# Altium PCB UVA2.0 PCB.PcbDoc
Units mil, origin at the board's own origin, x right, y up, seen from the top; angles counter-clockwise.
Board outline 3862.4 x 3862.41 mil, 2 copper layers (Top Layer, Bottom Layer); 74 components, 54 nets, 233 pads, 124 vias.
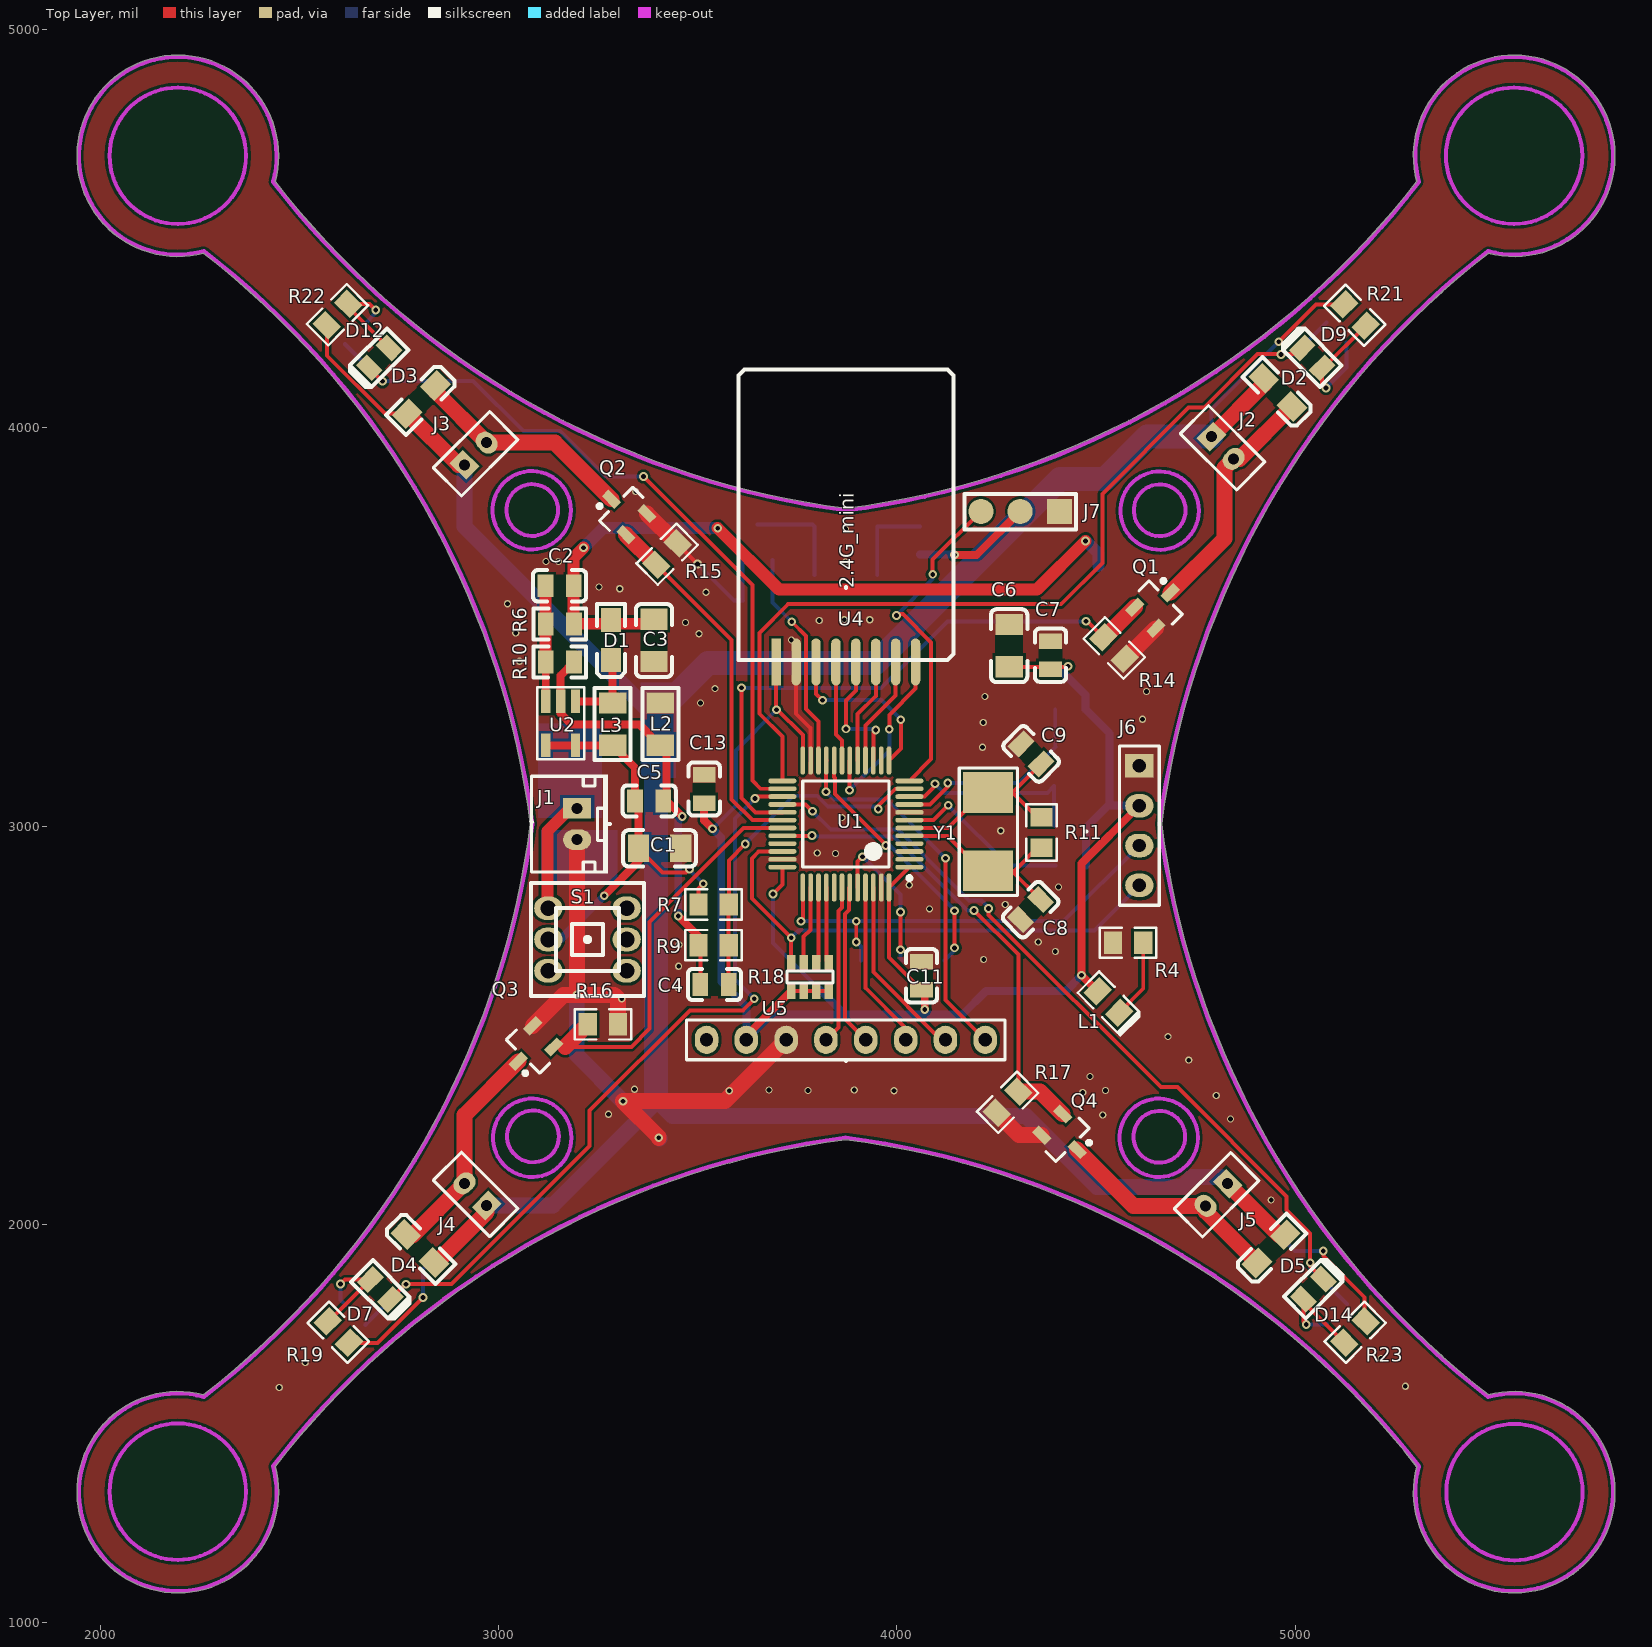
[diagram p0: Top Layer view]
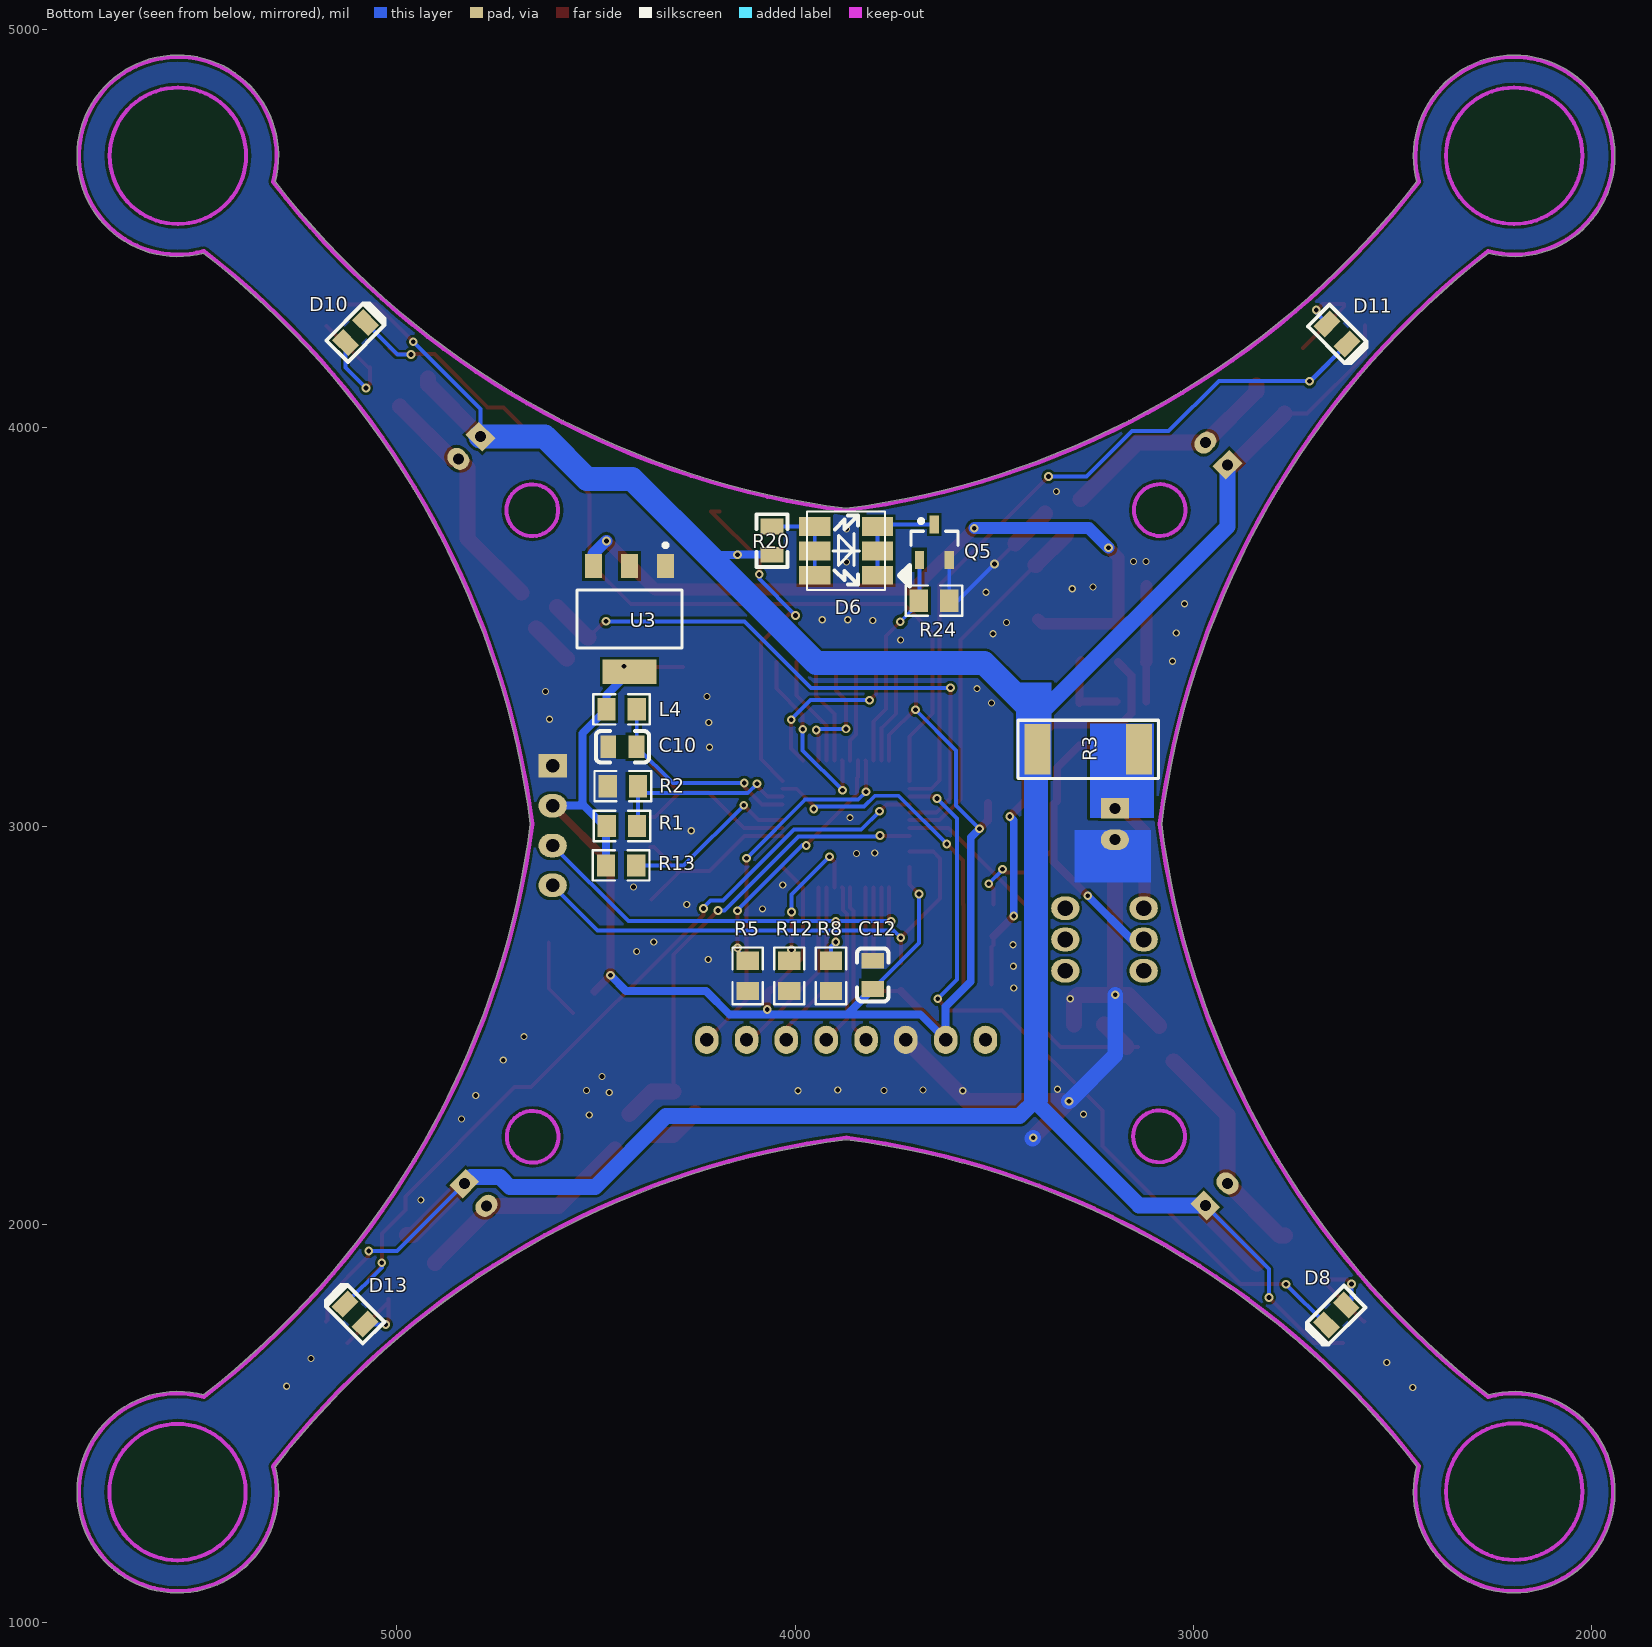
[diagram p1: Bottom Layer view, seen from below]

## Layer stack, top to bottom
Top Solder: solder mask 0.4, Solder Resist, Dk 3.5
Top Layer: signal copper 1.4
Dielectric 1: dielectric 12.6, FR-4, Dk 4.8
Bottom Layer: signal copper 1.4
Bottom Solder: solder mask 0.4, Solder Resist, Dk 3.5

## Board outline
2447.14,1326.91 ccw(c2194.09,1326.91) 2438.72,1391.65 cw(c4151.14,63.5) 3871.59,2212.51 cw(c3592.71,63.41) 5305.61,1390.95 ccw(c5550.41,1326.91) 5803.46,1326.91 ccw(c5550.41,1326.91) 5485.67,1571.53 cw(c6813.82,3283.95) 4664.73,3005.07 cw(c6813.82,2726.18) 5485.67,4438.61 ccw(c5550.41,4683.23) 5803.46,4683.23 ccw(c5550.41,4683.23) 5305.79,4618.48 cw(c3593.37,5946.64) 3872.25,3797.54 cw(c4151.14,5946.64) 2438.72,4618.48 ccw(c2194.09,4683.23) 2447.14,4683.23 ccw(c2194.09,4683.23) 2258.84,4438.61 cw(c930.69,2726.18) 3079.78,3005.07 cw(c930.69,3283.95) 2258.84,1571.53 ccw(c2194.09,1326.91)

## Design rules (kind name [scope] priority, off if disabled: settings)
Clearance [All] p1: gap=7
PlaneConnect [All] p1: planeconnectstyle=Direct reliefexpansion=20 reliefentries=4 reliefconductorwidth=10 reliefairgap=10
PolygonConnect [All] p1: connectstyle=Direct reliefconductorwidth=10 reliefentries=4 polygonreliefangle="90 Angle" airgapwidth=10
RoutingVias [All] p1: holewidth=12 width=22 viastyle="Through Hole" minholewidth=12 minwidth=22 maxholewidth=28 maxwidth=50
SolderMaskExpansion [All] p1: expansion=4
Width [All] p1: maxlimit=60 minlimit=10 preferedwidth=10
28 further rules are at their usual default settings.

## Components (designator, comment, footprint, x,y, rotation, side; value= is the part's Value field where it differs from the comment)
C1 "10UF" 1206C 3404,2944 r180 top
C2 "3.3pF" 0805C 3153,3603.25 r180 top
C3 "4.7UF" 1206C 3390,3466 r270 top
C4 "100NF" 0805C 3542,2602 r180 top
C5 "4.7UF" 0805C 3378,3063 r0 top
C6 "10UF" 1206C 4282,3453 r90 top
C7 "0.1UF" 0805C 4386,3429 r90 top
C8 "20PF" 0805C 4336,2790 r45 top
C9 "20PF" 0805C 4337,3181 r315 top
C10 "100NF" 0805C 4433.64,3199 r0 bottom
C11 "100NF" 0805C 4062,2624 r90 top
C12 "100NF" 0805C 3805,2626 r90 bottom
C13 "100NF" 0805C 3516,3093 r90 top
D1 "DIODE-S" C_SMA_3216 3282,3467 r90 top
D2 "DIODE-S" C_SMA_3216 4957,4089 r135 top
D3 "DIODE-S" C_SMA_3216 2806,4071 r225 top
D4 "DIODE-S" C_SMA_3216 2802,1939 r315 top
D5 "DIODE-S" C_SMA_3216 4940,1938 r45 top
D6 "LED" LED5050_RGB 3872,3691 r180 bottom
D7 "LED" 0805D 2703,1836 r315 top
D8 "LED" 0805D 2641,1772 r315 bottom
D9 "LED" 0805D 5043.19,4176 r135 top
D10 "LED" 0805D 5104,4239 r135 bottom
D11 "LED" 0805D 2639,4236 r225 bottom
D12 "LED" 0805D 2700,4176 r225 top
D13 "LED" 0805D 5105,1774 r45 bottom
D14 "LED" 0805D 5046,1837 r45 top
J1 "Li Battery - 3.7V" P2_2.0-2 3197,3005 r270 top locked
J2 "M1" P2_2.0-1 4818,3950 r135 top
J3 "M1" P2_2.0-1 2942,3935 r225 top
J4 "M1" P2_2.0-1 2942,2074.81 r315 top
J5 "M1" P2_2.0-1 4803,2074 r45 top
J6 "ST_LINK" P4_2.54-1 4609,3001 r270 top
J7 "SIP3" PC_3 4408,3790 r180 top
L1 "白" D0805 4505,2584 r315 top
L2 "10UH" 1206 3406,3256 r270 top
L3 "10UH" 1206 3286,3256 r270 top
L4 "INDUCTOR" R0805 4436,3293 r180 bottom
Q1 "SI2302" SI2302 4655,3555 r45 top
Q2 "SI2302" SI2302 3314,3789 r135 top
Q3 "SI2302" SI2302 3081,2440 r225 top
Q4 "SI2302" SI2302 4422,2219 r315 top
Q5 "SI2302" SI2302 3651,3713 r90 bottom
R1 "RES" R0805 4435,3000 r0 bottom
R2 "RES" R0805 4433,3100 r180 bottom
R3 "0R" "2512R - duplicate" 3264,3193 r0 bottom
R4 "Res1" R0805 4581,2707 r180 top
R5 "RES" R0805 4119.43,2624 r270 bottom
R6 "620K" 0805R 3153.85,3507.2 r0 top
R7 "RES" R0805 3539.64,2803 r0 top
R8 "RES" R0805 3910,2624 r270 bottom
R9 "RES" R0805 3540.06,2700.93 r180 top
R10 "200K" 0805R 3153.85,3412 r180 top
R11 "RES" R0805 4363,2984 r270 top
R12 "RES" R0805 4014.57,2623.58 r90 bottom
R13 "RES" R0805 4437,2901 r180 bottom
R14 "RES" R0805 4546,3447 r135 top
R15 "RES" R0805 3423,3683 r225 top
R16 "RES" R0805 3262,2502 r180 top
R17 "RES" R0805 4278,2306 r45 top
R18 "10k" 8P4R_0603 3781,2621 r90 top
R19 "RES" R0805 2597,1729 r315 top
R20 "100R" 0805R 4058,3717 r90 bottom
R21 "RES" R0805 5150,4283 r315 top
R22 "RES" R0805 2595,4284 r45 top
R23 "RES" R0805 5151,1729 r225 top
R24 "RES" R0805 3651,3566 r0 bottom
S1 "SW-DPDT" KEY_KFT7.0 3223,2715 r180 top locked
U1 "STM32F103C8T6" LQFP48_N 3872,3005 r180 top locked
U2 "TPS6140" SOT-23-5 3193,3313 r270 top
U3 "AMS1117" ZZ311 4416,3520 r0 bottom
U4 "2.4G" 2.4G_mini 3697,3412 r0 top locked
U5 "GY_86" P8_2.54-1 3872,2463 r0 top locked
Y1 "CRYSTAL1" Y2 4229,2986 r270 top

## Footprints (in the part's own frame and the unit in brackets; to place one, negate y for a bottom-side part, rotate by r counter-clockwise, add the part's x,y. Pads: shape width x height; smd on the part's side, far side on the other; paste and mask are expansions set on the pad)
2.4G_mini [mm]
  rect 0.6x3 smd: 1(0,0)
  oval 0.6x3 smd: 2(1.27,0) 3(2.54,0) 4(3.81,0) 5(5.08,0) 6(6.35,0) 7(7.62,0) 8(8.89,0)
  silkscreen extent -2.41,0.13 11.3,18.67
8P4R_0603 [mil]
  rect 40x21.65 smd: 1(-35,46.5) 2(35,46.5) 3(-35,15) 4(35,15) 5(-35,-16.5) 6(35,-16.5) 7(-35,-47.99) 8(35,-47.99)
  silkscreen extent -15,-59 15,56
0805C [mm]
  rect 1x1.45 smd: 1(-0.9,0) 2(0.9,0)
  Top Layer pour cut-out: -0.432,0.749 -0.432,-0.737 0.406,-0.737 0.406,0.749
  silkscreen extent -1.7,-1 1.7,1, body extent -1,-0.61 1,0.64, height 1
0805D [mm]
  rect 1x1.45 smd: 1(-0.9,0) 2(0.9,0)
  Top Layer pour cut-out: -0.432,0.749 -0.432,-0.737 0.406,-0.737 0.406,0.749
  silkscreen extent -1.66,-0.98 1.94,0.98, body extent -1.16,-0.68 1.14,0.67, height 0.76
0805R [mm]
  rect 1x1.45 smd: 1(-0.9,0) 2(0.9,0)
  Top Layer pour cut-out: -0.432,0.749 -0.432,-0.737 0.406,-0.737 0.406,0.749
  silkscreen extent -1.68,-0.98 1.68,0.98, body extent -1,-0.62 1,0.63, height 0.5
1206 [mm]
  rect 1.35x1.75 smd: 1(-1.35,0) 2(1.35,0)
  Top Layer pour cut-out: -0.686,0.864 0.673,0.864 0.673,-0.876 -0.686,-0.876
  silkscreen extent -2.3,-1.14 2.3,1.14, body extent -1.61,-0.81 1.59,0.79, height 1.5
1206C [mm]
  rect 1.35x1.75 smd: 1(-1.35,0) 2(1.35,0)
  Top Layer pour cut-out: -0.686,0.876 0.673,0.876 0.673,-0.864 -0.686,-0.864
  silkscreen extent -2.32,-1.16 2.32,1.16, body extent -1.65,-0.81 1.55,0.79, height 1
"2512R - duplicate" [mm]
  rect 1.65x3.2 smd: 1(-3.24,0) 2(3.24,0)
  silkscreen extent -4.49,-1.84 4.48,1.87, body extent -2.48,-1.26 2.52,1.24, height 0.6
C_SMA_3216 [mil] "英制1206/公制3216"
  rect 60x50 smd: 1(-50,0) 2(50,0)
  Top Layer pour cut-out: -19.68,29.53 19.68,29.53 19.68,-29.53 -19.68,-29.53
  silkscreen extent -93,-35 91,35, body extent -66,-33 68,33, height 67
D0805 [mil]
  rect 46x56 smd: 1(-1,0) 2(75,0)
  silkscreen extent -34,-40 120,40
KEY_KFT7.0 [mm] "7X7mm"
  oval 1.8x1.5 hole 1: 1(-2.5,2) 2(-2.5,0) 3(-2.5,-2) 4(2.5,-2) 5(2.5,0) 6(2.5,2)
  silkscreen extent -3.6,-3.6 3.6,3.6
LED5050_RGB [mm]
  rect 2x1.2 smd paste-0.05 mask+0.05: 1(-2,1.55) 2(-2,0) 3(-2,-1.55) 4(2,-1.55) 5(2,0) 6(2,1.55)
  silkscreen extent -2.51,-2.49 4.06,2.51, body extent -2.68,-2.5 2.62,2.5, height 1.6
LQFP48_N [mm]
  oval 1.8x0.3 smd: 1(-4.05,2.75) 2(-4.05,2.25) 3(-4.05,1.75) 4(-4.05,1.25) 5(-4.05,0.75) 6(-4.05,0.25) 7(-4.05,-0.25) 8(-4.05,-0.75) 9(-4.05,-1.25) 10(-4.05,-1.75) 11(-4.05,-2.25) 12(-4.05,-2.75) 25(4.05,-2.75) 26(4.05,-2.25) 27(4.05,-1.75) 28(4.05,-1.25) 29(4.05,-0.75) 30(4.05,-0.25) 31(4.05,0.25) 32(4.05,0.75) 33(4.05,1.25) 34(4.05,1.75) 35(4.05,2.25) 36(4.05,2.75)
  oval 0.3x1.8 smd: 13(-2.75,-4.05) 14(-2.25,-4.05) 15(-1.75,-4.05) 16(-1.25,-4.05) 17(-0.75,-4.05) 18(-0.25,-4.05) 19(0.25,-4.05) 20(0.75,-4.05) 21(1.25,-4.05) 22(1.75,-4.05) 23(2.25,-4.05) 24(2.75,-4.05) 37(2.75,4.05) 38(2.25,4.05) 39(1.75,4.05) 40(1.25,4.05) 41(0.75,4.05) 42(0.25,4.05) 43(-0.25,4.05) 44(-0.75,4.05) 45(-1.25,4.05) 46(-1.75,4.05) 47(-2.25,4.05) 48(-2.75,4.05)
  silkscreen extent -4.18,-2.75 2.75,3.57
P2_2.0-1 [mm]
  rect 1.2x1.5 hole 0.7: 1(1,0)
  oval 1.2x1.5 hole 0.7: 2(-1,0)
  silkscreen extent -2.54,-1.27 2.54,1.27
P2_2.0-2 [mm]
  rect 1.3x1.8 hole 0.7: 1(-1,0)
  oval 1.3x1.8 hole 0.7: 2(1,0)
  silkscreen extent -3.15,-2.9 3.16,1.97, body extent -2.99,-2.8 3.01,1.7, height 6
P4_2.54-1 [mm]
  rect 1.5x1.8 hole 0.85: 1(-3.81,0)
  oval 1.5x1.8 hole 0.85: 2(-1.27,0) 3(1.27,0) 4(3.81,0)
  silkscreen extent -5.08,-1.27 5.08,1.27, body extent -5.08,-1.47 5.08,1.45, height 8.56
P8_2.54-1 [mm]
  oval 1.5x1.8 hole 0.85: 1(-8.89,0) 2(-6.35,0) 3(-3.81,0) 4(-1.27,0) 5(1.27,0) 6(3.81,0) 7(6.35,0) 8(8.89,0)
  silkscreen extent -10.16,-1.27 10.16,1.27, body extent -10.16,-1.47 10.16,1.45, height 8.56
PC_3 [mm]
  rect 1.6x1.6 smd: 1(0,0)
  round 1.6 smd: 2(2.5,0) 3(5,0)
  silkscreen extent -1.07,-1.12 6.05,1.14
R0805 [mil]
  rect 46x56 smd: 1(-37.79,0.07) 2(38.21,0.07)
  silkscreen extent -71,-38 71,38
SI2302 [mm]
  rect 1.15x0.6 smd: 1(-1.128,0.934) 2(-1.128,-0.966) 3(1.122,-0.016)
  silkscreen extent -0.2,-1.52 1.47,1.48, body extent -0.7,-1.52 0.7,1.48, height 1.1
SOT-23-5 [mm]
  rect 1.5x0.6 smd: 1(0,0) 2(0,-0.95) 3(0,-1.9) 4(2.8,-1.9) 5(2.8,0)
  silkscreen extent -0.9,-2.45 3.7,0.55
Y2 [mm]
  rect 2.6x3.2 smd: 1(-2.5,0) 2(2.5,0)
  silkscreen extent -4.06,-1.83 4.09,1.87
ZZ311 [mm]
  rect 1.1x1.55 smd: 1(-2.3,-3.375) 2(0,-3.375) 3(2.3,-3.375)
  rect 3.45x1.55 smd: 4(0,3.375)
  silkscreen extent -3.35,-4.82 3.35,1.85

## Part data
C1 C2 C3 C4 C5 C6 C7 C8 C9 C10 C11 C12 C13: library part CAP, "Capacitor/小容量电容"
D1 D2 D3 D4 D5: "SCHOTTKEY"
D6: library part LED_5050RGB
J1 J2 J3 J4 J5: library part SIP2
J6: library part SIP4
L1: library part LED
L2 L3: library part L
R1 R2 R5 R7 R8 R9 R11 R12 R13 R14 R15 R16 R17 R19 R21 R22 R23 R24: "Semiconductor Resistor"
R3: library part Res_1
R4: "Resistor"
R6 R10 R20: library part Res
R18: library part 8P4R_0603, "8P4R_0603"
S1: "Double-Pole, Double-Throw Switch"
U1: "STM32 ARM-based 32-bit MCU with 64 Kbytes Flash, 48-pin LQFP, Industrial Temperature"
U3: "Header, 2-Pin"
U4: library part 2.4G_mini

## Via types
v1: diameter 22, hole 12, Top Layer to Bottom Layer, 65 vias
v2: diameter 18, hole 12, Top Layer to Bottom Layer, 59 vias

## Nets (pads, with @x,y where several pads share a name; then routed paths per layer and width w, separated by ;. In a path a pad name is that pad's centre, name@x,y a point inside that pad or via, vN(x,y) a via of type N, cw(c..) or ccw(c..) an arc to the next point about the centre after c; other vN are vias at no path point)
2.4_CE: U1.13 U4.3 | length 434.8
  Top Layer w10: U4.3 3797,3332 v1(3813,3316) ; U1.13 4010,3194.18 v1(4010,3267)
  Bottom Layer w10: v1(3813,3316) 3961,3316 v1(4010,3267)
2.4_CSN: U1.19 U4.4 | length 253.8
  Top Layer w10: U4.4 3847,3230 3862.16,3214.84 U1.19
2.4_IRQ: U1.18 U4.8 | length 465.6
  Top Layer w10: v1(3881,3090) 3881,3163.61 U1.18 ; v1(3981,3243) 3981,3279 4047,3345 U4.8
  Bottom Layer w10: v1(3881,3090) 3981,3190 v1(3981,3243)
2.4_MISO: U1.16 U4.7 | length 278.9
  Top Layer w10: U1.16 3921.21,3252.21 3997,3328 U4.7
2.4_MOSI: U1.17 U4.6 | length 266.4
  Top Layer w10: U1.17 3901.53,3281.53 3947,3327 U4.6
2.4_SCK: U1.15 U4.5 | length 333.7
  Top Layer w10: v1(3872,3244) 3872,3315 3897,3340 U4.5 ; U1.15 3940.9,3234.9 v1(3947,3241)
  Bottom Layer w10: v1(3872,3244) 3944,3244 v1(3947,3241)
505LED: Q5.1 R24.2 U1.22 | length 551.9
  Top Layer w10: v1(3736,3513) 3772,3477 3772,3294 3803.1,3262.9 U1.22
  Bottom Layer w10: Q5.1 3687.77,3561.23 v1(3736,3513)
+3.3V: C6.1 C7.1 C11.1 C12.1 C13.1 J6.2 L1.1 L4.1 R1.2 R13.1 R18.1 R18.3 R18.5 R18.7 U1.1 U1.24 U1.36 U1.48 U3.4 U4.1 U5.2 | length 4687.1
  Top Layer w10: v1(3689,2829) 3712.55,2852.55 U1.36 ; U4.1 3697,3295 v1@3698,3294 ; v1(3698,3292) v1@3698,3294 ; R18.1 R18.3 R18.5 R18.7 ; U1.24 3763.73,3228.27 v1@3698,3294 ; U1.1 U1.48 3980.27,2670.3 C11.1 ; C6.1 4428.72,3399.85 v1(4429.87,3401)
  Top Layer w20: C13.1 3516,3014 v1(3537,2993) ; U5.2 3622,2473.5 R18.1 ; C11.1 4070,2580.57 v1(4070,2539) ; L1.1 v1(4464,2625) 4464,2906 J6.2
  Bottom Layer w10: v1(3537,2993) 3596,3052 3596,3190 v1(3698,3292) ; v1(3689,2829) 3689,2706.57 C12.1 ; U3.4 v1(4429.87,3401)
  Bottom Layer w20: v1(3537,2993) 3559,2971 3559,2609.4 3622,2546.4 U5.2 3686,2527 3868.57,2527 ; C12.1 3868.57,2527 ; 4070,2527 3868.57,2527 ; v1(4070,2539) 4071,2538 4071,2527 4165.28,2527 4224.07,2585.79 4424.79,2585.79 v1(4464,2625) ; U3.4 4473.79,3329.34 L4.1 4534,3232.86 4534,3059 4542,3051 ; R13.1 4474.79,2995.79 4530,3051 J6.2
+5.0V: C2.1 C3.1 D1.2 R6.2 U3.3 | length 1879.5
  Top Layer w30: v1(3213,3699) 3188.43,3674.43 C2.1 3188.43,3508.05 3378.9,3508.05 C3.1 ; v1(3550,3748) 3704,3594 4352,3594 v1(4474,3716)
  Bottom Layer w30: v1(3213,3699) 3262,3748 v1(3550,3748) ; v1(4474,3716) 4506.55,3683.45 U3.3
ADC: C4.1 R7.2 R9.1 U1.11 | length 871.7
  Top Layer w10: C4.1 3577.43,2802.65 R7.2 3577.85,2913.85 v1(3619,2955) ; v1(3953,3043) 3953,3050.3 3996.28,3093.58 U1.11
  Bottom Layer w10: v1(3619,2955) 3740,3076 3799.47,3076 3826.47,3049 3947,3049 v1(3953,3043)
BAT: J1.1 R3.1 S1.4 | length 292.8
  Top Layer w30: S1.4@3124,2793 3123,2794 3123,2988 3179.37,3044.37 J1.1
BAT+: D2.2 D3.2 D4.2 D5.2 J2.1 J3.1 J4.1 J5.1 J7.2 R3.2 R19.2 R20.1 R21.1 R22.1 R23.1 | length 8536.2
  Top Layer w10: R22.1 2568.23,4181.77 2714.36,4035.64 D3.2 ; R19.2 2696.03,1702.03 v1(2810,1816) ; v1(4959,4216) 5052.77,4309.77 R21.1 ; v1(5071,1933) 5071,1920 5174.49,1816.51 5174.49,1758.96 R23.1
  Top Layer w20: v1(4145,3681) 4200.57,3681 J7.2
  Top Layer w40: D3.2 2899.13,3907.16 J3.1 ; D4.2@2840.36,1900.64 2969.84,2030.13 J4.1 ; J2.1 4921.64,4109.32 D2.2 ; J5.1 4959.32,1973.36 D5.2
  Bottom Layer w10: v1(2810,1816) 2810,1887.14 J4.1 ; J2.1 4790.16,4047.16 v1(4959,4216) ; J5.1 4999.68,1933 v1(5071,1933)
  Bottom Layer w20: R20.1 v1@4145,3681.57 ; v1(4145,3681) 4207,3681 4213,3675
  Bottom Layer w40: J3.1 2914.16,3751.84 3391.5,3274.5 ; J4.1 3135.98,2046.98 3395,2306 ; 3395,2313 3436,2272 4324,2272 4502.5,2093.5 4716.5,2093.5 4741,2118 4814.68,2118 J5.1
  Bottom Layer w60: 3391.5,3274.5 3526,3409 3947,3409 4213,3675 4410,3872 4523,3872 4628.84,3977.84 J2.1 ; 3395,2313 3395,3151.56 R3.2@3414,3170.56
GND: C1.1 C3.2 C6.2 C7.2 C8.1 C9.1 C10.2 C11.2 C12.2 C13.2 J1.2 J6.1 J7.1 L2.1 Q1.2 Q2.2 Q3.2 Q4.2 Q5.2 R2.1 R4.2 R5.2 R8.2 R12.1 R14.1 R15.1 R16.1 R17.1 R24.1 U1.8 U1.23 U1.35 U1.47 U3.1 U4.2 U5.3 | length 2567.7
  Top Layer w10: R15.1@3447.11,3709.67 3447.33,3709.67 v1(3499,3658) ; U4.2 3747,3282 3783.42,3245.58 U1.23
  Top Layer w40: Q3.2 3163.22,2576 v1(3196,2576) ; J1.2 3197,2577 v1(3196,2576) ; R16.1 3299.79,2566.21 3290,2576 v1(3196,2576) ; Q2.2 R15.1@3447.11,3709.67 ; v1(3402,2217) 3402,2219 v1(3312,2309) 3568,2309 U5.3 ; R17.1 4307.05,2223.51 Q4.2 ; R14.1 4574.01,3420.23 Q1.2
  Bottom Layer w10: v1(3499,3658) 3591.07,3565.93 R24.1 3612.97,3566.17 Q5.2
  Bottom Layer w40: v1(3196,2576) 3196,2425 v1(3312,2309) ; v1(3402,2217) v1@3404,2215
  other v2: 2449,1590 5277,1593 2514,1653 5216,1663 4940,2061 4838,2264 4517,2274 3276,2276 4802,2323 4467,2331 3579,2335 3993,2335 3777,2336 4524,2336 3679,2337 3893,2337 3341,2339 4485,2371 4733,2412 4681,2471 3309,2566 3451,2593 3452,2648 4218,2665 4398,2685 3453,2702 4355,2709 4082,2792 4272,2803 4406,2847 4031,2852 3846,2931 3800,2932 4261,2988 3862,3021 4215,3198 4217,3260 4617,3268 3507,3309 4221,3325 4627,3338 3543,3345 3052,3414 3735,3467 3503,3483 3043,3485 3469,3511 3805,3516 3868,3518 3932,3518 3022,3558 3521,3587 3304,3596 3252,3600 3871,3663 3119,3664 3150,3664 3871,3746 3344,3840
GY_DRDY: U1.21 U5.8 | length 945.4
  Top Layer w10: v1(3822,3086) 3822,3163.66 U1.21 ; v1(4122,2919) 4122,2563 U5.8
  Bottom Layer w10: v1(3822,3086) 3842,3066 3975,3066 v1(4122,2919)
GY_FSYNC: U1.45 U5.6 | length 424.3
  Top Layer w10: U1.45 3921.21,2593.79 4022,2493 U5.6
GY_INTA: U1.46 U5.7 | length 464
  Top Layer w10: U1.46 3940.9,2633.1 4111,2463 U5.7
GY_SCL: U1.42 U5.4 | length 399.2
  Top Layer w10: U5.4 3853,2494 3853,2786.04 3862.16,2795.2 U1.42
GY_SDA: U1.43 U5.5 | length 409
  Top Layer w10: U1.43 3880.06,2843.77 3880.06,2789.06 3870,2779 3870,2515 U5.5
JTCK: J6.3 R8.1 U1.37 | length 1119.4
  Top Layer w10: v1(3759,2761) 3763.73,2765.73 U1.37 ; v1(3898,2709) v1(3898,2761)
  Bottom Layer w10: v1(3759,2761) v1(3898,2761) 4419,2761 J6.3 ; v1(3898,2709) 3909.93,2697.07 R8.1
JTDI: R18.4 U1.38 | length 196.8
  Top Layer w10: R18.4 3766,2722 3783.42,2739.42 U1.38
JTDO: R18.6 U1.39 | length 191.9
  Top Layer w10: R18.6 3803.1,2661.61 U1.39
JTMS: J6.4 R18.2 U1.34 | length 1316.4
  Top Layer w10: U1.34 3653.1,2936.1 3636,2919 3636,2818 v1(3734.5,2719.5) R18.2
  Bottom Layer w10: v1(3734.5,2719.5) 3753.01,2738 4496,2738 J6.4
JTRST: R18.8 U1.40 | length 192.1
  Top Layer w10: U1.40 3822.79,2662.2 R18.8
LED_1: D9.2 D10.2 U1.25 | length 2303.7
  Top Layer w10: U1.25 3712.55,3224.45 3655,3282 3655,3485 3727,3557 4412,3557 4516,3661 4516,3834 4733,4051 4772,4051 4906,4185 5002.08,4185 D9.2
  Bottom Layer w10: v1(4965,4184) 4998.89,4184 D10.2
LED_2: D11.2 D12.2 U1.26 | length 2030.9
  Top Layer w10: D12.2 2674.95,4149.94 v1(2708,4116.89) ; v1(3364,3878) 3637,3605 3637,3114 3657.42,3093.58 U1.26
  Bottom Layer w10: v1(2708,4116.89) D11.2 2613.95,4209.06 2705,4118 2936,4118 3062,3992 3154,3992 3268,3878 v1(3364,3878)
LED_3: D7.2 D8.2 U1.27 | length 2036
  Top Layer w10: D7.2 v1@2766.55,1849.44 ; v1@2767.11,1850 2881.82,1850 3228,2196.18 3228,2285 3480,2537 3613,2537 v1(3642,2566) ; v1(3644,3069) 3648.9,3073.9 U1.27
  Bottom Layer w10: D8.2 2666.05,1748.06 v1(2767,1849) ; v1(3642,2566) 3594,2614 3594,3019 v1(3644,3069)
LED_4: D13.2 D14.2 U1.28 | length 2072.8
  Top Layer w10: U1.28 3770.79,3054.21 v1(3788,3037) ; v1(4230,2793) 4230,2777 4663,2344 4705,2344 4979,2070 4979,2036 5038,1977 v1(5038,1903) 5038,1895.11 D14.2
  Bottom Layer w10: v1(3788,3037) 3834,2991 4003,2991 4181,2813 4212,2813 4230,2795 v1(4230,2793) ; v1(5038,1903) 5038,1891.11 D13.2
MOS_1: Q1.1 R14.2 U1.29 | length 1498.9
  Top Layer w10: v1(3610,3347) 3610,3070 3645.47,3034.53 U1.29 ; v1(4475,3514) 4478.9,3514 R14.2
  Top Layer w40: R14.2 4521.97,3473.97 Q1.1
  Bottom Layer w10: v1(3610,3347) 3960,3347 4127,3514 v1(4475,3514)
MOS_2: Q2.1 R15.2 U1.30 | length 924.3
  Top Layer w10: R15.2 3585,3466.96 3585,3067 3637.16,3014.84 U1.30
  Top Layer w40: Q2.1 3395.07,3655.93 R15.2
MOS_3: Q3.1 R16.2 U1.31 | length 1038.8
  Top Layer w10: Q3.1 3167.26,2445.4 3333.4,2445.4 3379,2491 3379,2759 3615.16,2995.16 U1.31
  Top Layer w40: 3167.26,2445.4 R16.2
MOS_4: Q4.1 R17.2 U1.32 | length 1195.5
  Top Layer w10: U1.32 3786.47,2975.47 v1(3787,2976) ; v1(4194,2788) 4304.97,2677.03 R17.2
  Top Layer w40: R17.2 4359.93,2333.07 Q4.1
  Bottom Layer w10: v1(3787,2976) 3789,2974 3991,2974 4177,2788 v1(4194,2788)
NetC1_2: C1.2 C5.1 L3.2 R7.1 S1.5 U2.4 U2.5 | length 1059
  Top Layer w10: C1.2 3411.83,2883.02 3470.49,2883.02 v1(3479,2891.53) ; R7.1 3501.85,2842.85 v1(3514,2855)
  Top Layer w20: U2.4 U2.5 3285.91,3202.76 L3.2 3342.57,3146.28 C5.1 3350.85,3054.72 C1.2 3350.85,2910.85 v1(3265,2825)
  Bottom Layer w10: v1(3479,2891.53) 3479,2890 v1(3514,2855)
  Bottom Layer w20: S1.5 3155,2715 v1(3265,2825)
NetC2_2: C2.2 R6.1 R10.2 U2.3 | length 290.7
  Top Layer w20: U2.3 3118.2,3411.78 R10.2
  Top Layer w30: C2.2 3117.57,3412.85 R10.2
NetC8_2: C8.2 R11.2 U1.5 Y1.2 | length 495.1
  Top Layer w10: U1.5 4127.53,2975.47 4215.43,2887.57 Y1.2 4295.57,2887.57 4354.79,2946.79 R11.2@4363.07,2946.79 ; Y1.2@4288.54,2887.57 C8.2
NetC9_2: C9.2 R11.1 U1.6 Y1.1 | length 495.3
  Top Layer w10: U1.6 4128.16,2995.16 4217.43,3084.43 Y1.1 Y1.1@4290.54,3084.43 ; C9.2 Y1.1@4290.54,3084.43 ; R11.1@4363.07,3022.79 4352.17,3022.79 Y1.1@4290.54,3084.43
NetC10_1: C10.1 L4.2 U1.9 | length 526.2
  Top Layer w10: U1.9 4083.21,3054.21 4128,3099 v1(4128,3108)
  Bottom Layer w10: v1(4128,3108) 4307.2,3108 C10.1 4397.79,3199.42 L4.2
NetD1_1: D1.1 L3.1 U2.1 | length 204.1
  Top Layer w20: U2.1 3282.15,3313 L3.1 3286,3413 D1.1
NetD2_1: D2.1 J2.2 Q1.3 | length 603.3
  Top Layer w40: Q1.3 4823,3722.11 4823,3899.32 J2.2 4860.87,3922.16 D2.1
NetD3_1: D3.1 J3.2 Q2.3 | length 569
  Top Layer w40: D3.1 2841.36,4091.32 J3.2 3141.05,3962.84 Q2.3
NetD4_1: D4.1 J4.2 Q3.3 | length 561.4
  Top Layer w40: D4.1@2769.64,1971.36 2782.86,1971.36 J4.2 2914.16,2274.05 Q3.3
NetD5_1: D5.1 J5.2 Q4.3 | length 578
  Top Layer w40: Q4.3 4593.95,2046.16 J5.2 4775.16,2032.13 D5.1
NetD6_1: D6.1 D6.2 D6.3 R20.2 | length 229.5
  Bottom Layer w10: D6.3 D6.1 3951.15,3752.43 R20.2
NetD6_4: D6.4 D6.5 D6.6 Q5.3 | length 267.1
  Bottom Layer w10: Q5.3 3788.11,3757.17 D6.6 D6.4
NetD7_1: D7.1 D8.1 R19.1 | length 289.1
  Top Layer w10: R19.1 2572.66,1755.77 D7.1 2614.05,1861.06 v1(2603,1850)
  Bottom Layer w10: v1(2603,1850) 2603,1810 D8.1
NetD9_1: D9.1 D10.1 R21.2 | length 342.4
  Top Layer w10: v1(5078,4100) 5068.24,4109.76 D9.1 5071.98,4150.94 R21.2
  Bottom Layer w10: v1(5078,4100) 5129.06,4151.06 D10.1
NetD11_1: D11.1 D12.1 R22.2 | length 274.1
  Top Layer w10: v1(2691,4296) 2675.93,4311.07 R22.2 2621.97,4304.14 D12.1
  Bottom Layer w10: D11.1 2691,4288 v1(2691,4296)
NetD13_1: D13.1 D14.1 R23.2 | length 265
  Top Layer w10: D14.1 D14.1@5020.94,1805.02 ; v1(5028,1748) 5020.94,1755.06 D14.1@5020.94,1805.02 ; R23.2 D14.1@5020.94,1805.02
  Bottom Layer w10: v1(5028,1748) 5079,1748 D13.1
NetL1_2: L1.2 R4.1 | length 201.1
  Top Layer w10: L1.2 4618.79,2591.72 R4.1
NetR1_1: R1.1 R2.2 U1.10 | length 497.9
  Top Layer w10: U1.10 4069.9,3073.9 4096,3100 v1(4096,3106)
  Bottom Layer w10: v1(4096,3106) 4119,3083 4377.72,3083 R2.2 4394.79,3002.35 R1.1
NetR5_1: R5.1 U1.20 | length 645.3
  Top Layer w10: U1.20 3842.47,3123.53 3845,3121 3845,3080 v1@3973,2952 ; v1(4145,2694) v1(4145,2787.47)
  Bottom Layer w10: v1(3972,2951) 3973,2952 3982,2952 4145,2789 v1(4145,2787.47) ; R5.1 4145,2687.43 v1(4145,2694)
NetR12_2: R12.2 U1.44 | length 385.5
  Top Layer w10: U1.44 3901.53,2910.53 v1(3914,2923) ; v1(4009,2689) v1(4009,2784)
  Bottom Layer w10: v1(3914,2923) 4009,2828 v1(4009,2784) ; v1(4009,2689) 4009,2667.43 R12.2
NetR13_2: R13.2 U1.7 | length 445.2
  Top Layer w10: U1.7 4091.84,3014.84 v1(4129,3052)
  Bottom Layer w10: v1(4129,3052) 4279.93,2901.07 R13.2
OUT_1: J7.3 U1.12 | length 858
  Top Layer w10: v1(3999.12,3529) 4002.12,3532 4015,3532 4086.18,3460.82 4086.18,3168 U1.12 ; v1(4090,3632) 4090,3668.85 J7.3 J7.3@4190,3790
  Bottom Layer w10: v1(3999.12,3529) 4090,3619.88 v1(4090,3632)
SGND: C4.2 C5.2 L2.2 R9.2 R10.1 U2.2 | length 1077.7
  Top Layer w10: R9.2@3501.85,2723.15 R9.2 3506.57,2696.14 C4.2
  Top Layer w20: R10.1 3155.6,3378.32 U2.2 3155.6,3282.4 3183,3255 3353.85,3255 L2.2 3422,3186.85 3422,3063 v1(3461,3024) ; v1(3451,2774) R9.2@3501.85,2723.15
  Bottom Layer w20: v1(3451,2774) 3451,3014 v1(3461,3024)
pads on no net: S1.1 S1.2 S1.3 S1.6 U1.2 U1.3 U1.4 U1.14 U1.33 U1.41 U3.2 U5.1

## Polygon pours and split planes (outlines as drawn)
GND on Top Layer "Top Layer-No Net" (solid, remove dead copper, pour order 6): 1316.6,5534.99 1454.6,5396.99 6754.6,5396.99 6754.6,1096.99 6232.6,574.99 6167.6,509.99 1258.6,509.99
GND on Bottom Layer "Top Layer-No Net" (solid, remove dead copper, pour order 8): 1432.51,5252.73 6100.51,5252.73 6406.51,4946.73 6406.51,264.73 1378.51,264.73 1208.51,434.73

## Keep-outs
Top Layer:
  circle w10: c3083,3793 r98.43
  circle w10: c4657.81,2217.01 r98.43
  circle w10: c3084.19,2217.01 r98.43
  circle w10: c4660,3792 r98.43
Keep-Out Layer:
  circle w10: c2194.09,1328.23 r171.26
  circle w10: c5551.09,1327.23 r171.26
  circle w10: c5550.09,4683.23 r171.26
  circle w10: c4659.19,2219.51 r64.96
  circle w10: c3086.19,2220.51 r64.96
  circle w10: c4660,3793 r64.96
  circle w10: c3084.19,3793.51 r64.96
  circle w10: c2194.09,4683.23 r171.26
  lines w10: 2258.27,1566.49 ccw(c2194.09,1326.91) 2433.22,1392.75 cw(c4151.14,63.5) 3871.59,2217.57 cw(c3592.71,63.41) 5310.62,1392.67 ; 2259.94,1566.04 ccw(c930.69,3283.95) 3084.84,3005.07 ccw(c930.69,2726.18) 2259.94,4444.1 cw(c2194.09,4683.23) 2433.68,4619.05 ; 2433.22,4617.38 ccw(c4151.14,5946.64) 3872.25,3792.48 ; 3872,3792 ccw(c3593.11,5946.15) 5311.03,4616.9 ; 5310.83,1391.08 ccw(c5550.41,1326.91) 5484.57,1566.04 cw(c6813.82,3283.95) 4659.67,3005.07 cw(c6813.82,2726.18) 5484.57,4444.1 ; 5311.28,4617.38 cw(c5550.41,4683.23) 5486.24,4443.64

## Other copper
Bottom Layer:
  rectangle net BAT+: 3356,3120 3445,3360
  rectangle net BAT: 3099,3020 3260,3258
  rectangle net GND: 3106,2858 3299,2990

## Silkscreen, mask and mechanical layers (free items; w line width, h text height)
Top Overlay:
  lines w10: 3082.83,3011 3084.19,3009.64 ; 3277.02,3005.17 3279.8,3005.17 ; 3872.15,2409.83 3872.15,2412.62 ; 3872.36,3597.52 3872.36,3600.31 ; 4473.71,2985.96 4476.49,2985.96
Top Solder:
  circle w50: c2194,4683 r210.09
  circle w50: c5550,4683 r210.09
  circle w50: c5551,1327 r210.09
  circle w50: c2194,1328 r210.09

## Text inside footprints (layer, text, board x,y; h text height)
U4: Top Overlay "2.4G_mini" at 3892,3597 h35 r90